# Altium PCB USER_SW_Breakout.pcbdoc (part 4 of 5)
Units mm, origin at the board's own origin, x right, y up, seen from the top; angles counter-clockwise.
Board outline 125 x 23.5 mm, 2 copper layers (Top Layer, Bottom Layer), stack 0.533 mm thick; 24 components, 16 nets, 4985 pads, 3 vias.
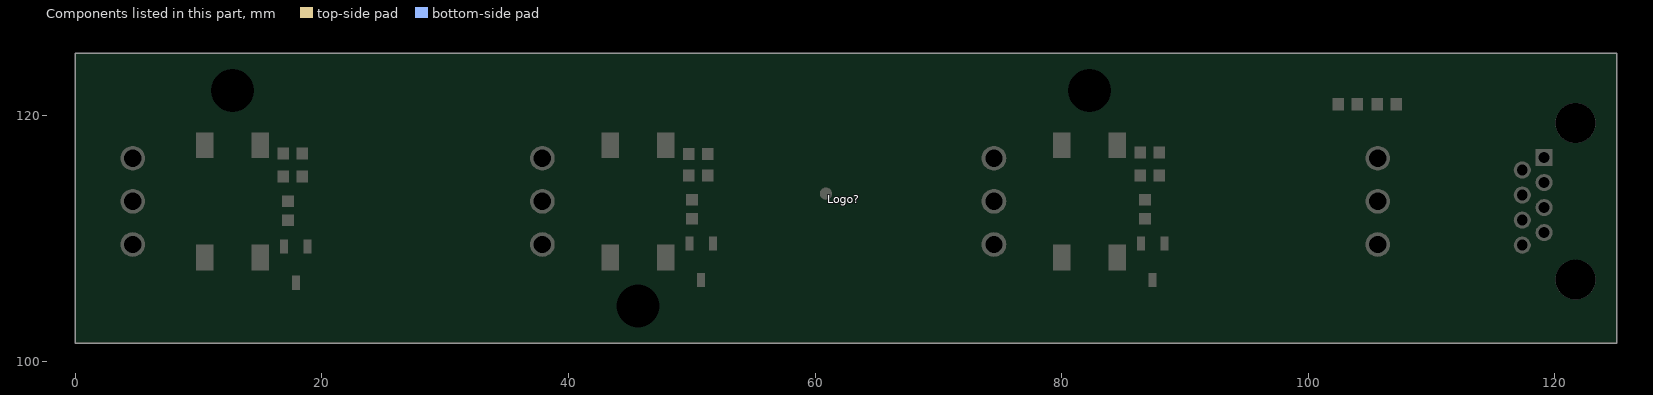
[diagram p4: the components of this part, seen from the top]

## Footprints (in the part's own frame and the unit in brackets; to place one, negate y for a bottom-side part, rotate by r counter-clockwise, add the part's x,y. Pads: shape width x height; smd on the part's side, far side on the other; paste and mask are expansions set on the pad) (continued)
Expatria-Logo [mil] "Expatria DXF logo" (continued)
  round 1.64 on Mech4: 1(-44849.01,43612.15) 1(-44849.01,43612.15) 1(-44848.55,43605.44) 1(-44848.55,43605.44) 1(-44848.1,43612.6) 1(-44848.1,43612.6) 1(-44847.68,43603.66) 1(-44847.68,43603.66) 1(-44846.77,43598.28) 1(-44846.77,43598.28) 1(-44845.44,43611.69) 1(-44845.44,43611.69) 1(-44844.53,43592.89) 1(-44844.53,43592.89) 1(-44844.08,43589.78) 1(-44844.08,43589.78) 1(-44842.3,43586.18) 1(-44842.3,43586.18) 1(-44841.84,43608.13) 1(-44841.84,43608.13) 1(-44841.84,43583.95) 1(-44841.84,43583.95) 1(-44841.39,43606.77) 1(-44841.39,43606.77) 1(-44840.52,43606.31) 1(-44840.52,43606.31) 1(-44840.06,43604.98) 1(-44840.06,43604.98) 1(-44838.73,43577.69) 1(-44838.73,43577.69) 1(-44838.73,43603.66) 1(-44838.73,43603.66) 1(-44838.28,43602.29) 1(-44838.28,43602.29) 1(-44837.37,43572.77) 1(-44837.37,43572.77) 1(-44836.92,43600.97) 1(-44836.92,43600.97) 1(-44836.04,43570.98) 1(-44836.04,43570.98) 1(-44835.59,43568.75) 1(-44835.59,43568.75) 1(-44835.13,43596.95) 1(-44835.13,43596.95) 1(-44834.26,43566.51) 1(-44834.26,43566.51) 1(-44834.26,43596.49) 1(-44834.26,43596.49) 1(-44833.81,43564.27) 1(-44833.81,43564.27) 1(-44833.81,43595.13) 1(-44833.81,43595.13) 1(-44832.9,43418.9) 1(-44832.9,43418.9) 1(-44832.9,43594.71) 1(-44832.9,43594.71) 1(-44832.44,43408.17) 1(-44832.44,43408.17) 1(-44832.44,43593.35) 1(-44832.44,43593.35) 1(-44831.57,43406.85) 1(-44831.57,43406.85) 1(-44831.57,43431.87) 1(-44831.57,43431.87) 1(-44831.12,43559.8) 1(-44831.12,43559.8) 1(-44831.12,43592.02) 1(-44831.12,43592.02) 1(-44830.66,43433.68) 1(-44830.66,43433.68) 1(-44830.66,43557.56) 1(-44830.66,43557.56) 1(-44830.66,43590.66) 1(-44830.66,43590.66) 1(-44830.21,43406.39) 1(-44830.21,43406.39) 1(-44830.21,43437.7) 1(-44830.21,43437.7) 1(-44829.79,43407.26) 1(-44829.79,43407.26) 1(-44829.33,43589.33) 1(-44829.33,43589.33) 1(-44828.88,43407.26) 1(-44828.88,43407.26) 1(-44828.88,43441.72) 1(-44828.88,43441.72) 1(-44827.97,43552.64) 1(-44827.97,43552.64) 1(-44827.55,43550.4) 1(-44827.55,43550.4) 1(-44827.55,43585.31) 1(-44827.55,43585.31) 1(-44826.64,43410.41) 1(-44826.64,43410.41) 1(-44826.64,43454.23) 1(-44826.64,43454.23) 1(-44826.19,43583.95) 1(-44826.19,43583.95) 1(-44825.73,43412.65) 1(-44825.73,43412.65) 1(-44825.73,43582.62) 1(-44825.73,43582.62) 1(-44825.31,43412.65) 1(-44825.31,43412.65) 1(-44824.41,43460.52) 1(-44824.41,43460.52) 1(-44824.41,43581.29) 1(-44824.41,43581.29) 1(-44823.95,43415.79) 1(-44823.95,43415.79) 1(-44823.95,43579.93) 1(-44823.95,43579.93) 1(-44823.5,43415.79) 1(-44823.5,43415.79) 1(-44823.08,43418.03) 1(-44823.08,43418.03) 1(-44823.08,43542.36) 1(-44823.08,43542.36) 1(-44822.62,43418.03) 1(-44822.62,43418.03) 1(-44822.62,43540.13) 1(-44822.62,43540.13) 1(-44822.62,43578.6) 1(-44822.62,43578.6) 1(-44822.17,43470.8) 1(-44822.17,43470.8) 1(-44822.17,43577.24) 1(-44822.17,43577.24) 1(-44821.71,43421.14) 1(-44821.71,43421.14) 1(-44821.26,43421.14) 1(-44821.26,43421.14) 1(-44820.84,43575.91) 1(-44820.84,43575.91) 1(-44820.39,43574.58) 1(-44820.39,43574.58) 1(-44819.93,43425.61) 1(-44819.93,43425.61) 1(-44819.48,43425.61) 1(-44819.48,43425.61) 1(-44819.02,43427.85) 1(-44819.02,43427.85) 1(-44818.6,43427.85) 1(-44818.6,43427.85) 1(-44817.7,43570.98) 1(-44817.7,43570.98) 1(-44817.24,43431.87) 1(-44817.24,43431.87) 1(-44817.24,43529.85) 1(-44817.24,43529.85) 1(-44817.24,43569.65) 1(-44817.24,43569.65) 1(-44816.79,43431.87) 1(-44816.79,43431.87) 1(-44816.37,43434.1) 1(-44816.37,43434.1) 1(-44816.37,43486.91) 1(-44816.37,43486.91) 1(-44815.91,43434.1) 1(-44815.91,43434.1) 1(-44815.91,43490.02) 1(-44815.91,43490.02) 1(-44815.46,43436.34) 1(-44815.46,43436.34) 1(-44815.01,43436.34) 1(-44815.01,43436.34) 1(-44815.01,43526.71) 1(-44815.01,43526.71) 1(-44815.01,43566.51) 1(-44815.01,43566.51) 1(-44814.55,43438.58) 1(-44814.55,43438.58) 1(-44814.55,43492.71) 1(-44814.55,43492.71) 1(-44814.13,43438.58) 1(-44814.13,43438.58) 1(-44814.13,43495.85) 1(-44814.13,43495.85) 1(-44814.13,43524.47) 1(-44814.13,43524.47) 1(-44814.13,43564.27) 1(-44814.13,43564.27) 1(-44813.22,43563.82) 1(-44813.22,43563.82) 1(-44813.22,43442.17) 1(-44813.22,43442.17) 1(-44812.77,43442.17) 1(-44812.77,43442.17) 1(-44812.77,43562.49) 1(-44812.77,43562.49) 1(-44812.31,43444.41) 1(-44812.31,43444.41) 1(-44811.9,43444.41) 1(-44811.9,43444.41) 1(-44811.44,43502.56) 1(-44811.44,43502.56) 1(-44811.44,43446.65) 1(-44811.44,43446.65) 1(-44811.44,43561.16) 1(-44811.44,43561.16) 1(-44810.99,43446.65) 1(-44810.99,43446.65) 1(-44810.99,43504.8) 1(-44810.99,43504.8) 1(-44810.99,43518.67) 1(-44810.99,43518.67) 1(-44810.99,43559.8) 1(-44810.99,43559.8) 1(-44810.53,43448.89) 1(-44810.53,43448.89) 1(-44810.08,43448.89) 1(-44810.08,43448.89) 1(-44809.66,43451.12) 1(-44809.66,43451.12) 1(-44809.2,43451.12) 1(-44809.2,43451.12) 1(-44809.2,43508.36) 1(-44809.2,43508.36) 1(-44809.2,43558.02) 1(-44809.2,43558.02) 1(-44808.75,43515.52) 1(-44808.75,43515.52) 1(-44808.75,43453.36) 1(-44808.75,43453.36) 1(-44808.75,43510.6) 1(-44808.75,43510.6) 1(-44808.75,43556.69) 1(-44808.75,43556.69) 1(-44808.3,43453.36) 1(-44808.3,43453.36) 1(-44807.84,43513.29) 1(-44807.84,43513.29) 1(-44807.42,43456.47) 1(-44807.42,43456.47) 1(-44807.42,43512.83) 1(-44807.42,43512.83) 1(-44807.42,43555.33) 1(-44807.42,43555.33) 1(-44806.97,43456.47) 1(-44806.97,43456.47) 1(-44806.97,43554) 1(-44806.97,43554) 1(-44806.51,43458.7) 1(-44806.51,43458.7) 1(-44806.06,43458.7) 1(-44806.06,43458.7) 1(-44805.6,43552.64) 1(-44805.6,43552.64) 1(-44805.19,43461.85) 1(-44805.19,43461.85) 1(-44804.73,43550.4) 1(-44804.73,43550.4) 1(-44804.73,43461.85) 1(-44804.73,43461.85) 1(-44803.82,43549.98) 1(-44803.82,43549.98) 1(-44803.37,43548.62) 1(-44803.37,43548.62) 1(-44802.95,43465.41) 1(-44802.95,43465.41) 1(-44801.59,43546.84) 1(-44801.59,43546.84) 1(-44801.13,43471.7) 1(-44801.13,43471.7) 1(-44801.13,43545.51) 1(-44801.13,43545.51) 1(-44800.71,43471.7) 1(-44800.71,43471.7) 1(-44800.26,43473.94) 1(-44800.26,43473.94) 1(-44800.26,43545.05) 1(-44800.26,43545.05) 1(-44799.8,43543.69) 1(-44799.8,43543.69) 1(-44799.8,43473.94) 1(-44799.8,43473.94) 1(-44798.9,43543.27) 1(-44798.9,43543.27) 1(-44798.48,43541.91) 1(-44798.48,43541.91) 1(-44797.57,43541.45) 1(-44797.57,43541.45) 1(-44797.11,43540.13) 1(-44797.11,43540.13) 1(-44795.79,43539.22) 1(-44795.79,43539.22) 1(-44794.88,43483.76) 1(-44794.88,43483.76) 1(-44794.42,43486) 1(-44794.42,43486) 1(-44794,43486) 1(-44794,43486) 1(-44793.1,43488.69) 1(-44793.1,43488.69) 1(-44791.77,43546.84) 1(-44791.77,43546.84) 1(-44790.4,43486) 1(-44790.4,43486) 1(-44789.95,43484.67) 1(-44789.95,43484.67) 1(-44788.17,43481.52) 1(-44788.17,43481.52) 1(-44786.84,43480.2) 1(-44786.84,43480.2) 1(-44786.39,43478.83) 1(-44786.39,43478.83) 1(-44785.48,43558.93) 1(-44785.48,43558.93) 1(-44785.06,43560.26) 1(-44785.06,43560.26) 1(-44784.6,43477.5) 1(-44784.6,43477.5) 1(-44784.15,43476.18) 1(-44784.15,43476.18) 1(-44783.24,43475.72) 1(-44783.24,43475.72) 1(-44782.82,43474.36) 1(-44782.82,43474.36) 1(-44782.82,43563.4) 1(-44782.82,43563.4) 1(-44782.37,43564.73) 1(-44782.37,43564.73) 1(-44781,43566.06) 1(-44781,43566.06) 1(-44780.58,43567.42) 1(-44780.58,43567.42) 1(-44780.13,43471.7) 1(-44780.13,43471.7) 1(-44779.68,43470.34) 1(-44779.68,43470.34) 1(-44779.22,43568.75) 1(-44779.22,43568.75) 1(-44778.77,43570.11) 1(-44778.77,43570.11) 1(-44778.35,43516.85) 1(-44778.35,43516.85) 1(-44777.89,43467.23) 1(-44777.89,43467.23) 1(-44777.89,43516.85) 1(-44777.89,43516.85) 1(-44777.89,43570.53) 1(-44777.89,43570.53) 1(-44777.44,43571.89) 1(-44777.44,43571.89) 1(-44776.99,43519.09) 1(-44776.99,43519.09) 1(-44776.53,43519.09) 1(-44776.53,43519.09) 1(-44776.11,43514.62) 1(-44776.11,43514.62) 1(-44776.11,43465.87) 1(-44776.11,43465.87) 1(-44775.66,43513.29) 1(-44775.66,43513.29) 1(-44775.66,43464.54) 1(-44775.66,43464.54) 1(-44775.2,43522.23) 1(-44775.2,43522.23) 1(-44775.2,43575) 1(-44775.2,43575) 1(-44774.75,43522.23) 1(-44774.75,43522.23) 1(-44774.75,43576.37) 1(-44774.75,43576.37) 1(-44773.88,43524.47) 1(-44773.88,43524.47) 1(-44773.88,43511.96) 1(-44773.88,43511.96) 1(-44773.42,43510.6) 1(-44773.42,43510.6) 1(-44773.42,43577.69) 1(-44773.42,43577.69) 1(-44773.42,43524.47) 1(-44773.42,43524.47) 1(-44772.97,43579.06) 1(-44772.97,43579.06) 1(-44772.51,43526.71) 1(-44772.51,43526.71) 1(-44772.06,43526.71) 1(-44772.06,43526.71) 1(-44771.64,43509.27) 1(-44771.64,43509.27) 1(-44771.64,43580.38) 1(-44771.64,43580.38) 1(-44771.18,43460.52) 1(-44771.18,43460.52) 1(-44771.18,43507.91) 1(-44771.18,43507.91) 1(-44771.18,43528.94) 1(-44771.18,43528.94) 1(-44771.18,43581.71) 1(-44771.18,43581.71) 1(-44770.73,43459.16) 1(-44770.73,43459.16) 1(-44770.73,43528.94) 1(-44770.73,43528.94) 1(-44770.28,43582.17) 1(-44770.28,43582.17) 1(-44769.82,43531.18) 1(-44769.82,43531.18) 1(-44769.82,43583.53) 1(-44769.82,43583.53) 1(-44769.4,43531.18) 1(-44769.4,43531.18) 1(-44768.95,43457.83) 1(-44768.95,43457.83) 1(-44768.95,43506.13) 1(-44768.95,43506.13) 1(-44768.95,43532.51) 1(-44768.95,43532.51) 1(-44768.95,43583.95) 1(-44768.95,43583.95) 1(-44768.49,43456.47) 1(-44768.49,43456.47) 1(-44768.49,43504.8) 1(-44768.49,43504.8) 1(-44768.49,43532.51) 1(-44768.49,43532.51) 1(-44768.49,43585.31) 1(-44768.49,43585.31) 1(-44768.04,43533.87) 1(-44768.04,43533.87) 1(-44767.59,43533.87) 1(-44767.59,43533.87) 1(-44767.59,43585.76) 1(-44767.59,43585.76) 1(-44767.17,43535.2) 1(-44767.17,43535.2) 1(-44767.17,43587.09) 1(-44767.17,43587.09) 1(-44766.71,43455.14) 1(-44766.71,43455.14) 1(-44766.71,43535.2) 1(-44766.71,43535.2) 1(-44766.26,43453.81) 1(-44766.26,43453.81) 1(-44766.26,43536.56) 1(-44766.26,43536.56) 1(-44765.8,43536.56) 1(-44765.8,43536.56) 1(-44765.8,43588) 1(-44765.8,43588) 1(-44765.35,43537.89) 1(-44765.35,43537.89) 1(-44765.35,43589.33) 1(-44765.35,43589.33) 1(-44764.93,43537.89) 1(-44764.93,43537.89) 1(-44764.02,43451.99) 1(-44764.02,43451.99) 1(-44763.57,43450.67) 1(-44763.57,43450.67) 1(-44763.57,43590.66) 1(-44763.57,43590.66) 1(-44763.11,43541.04) 1(-44763.11,43541.04) 1(-44763.11,43592.02) 1(-44763.11,43592.02) 1(-44762.69,43541.04) 1(-44762.69,43541.04) 1(-44761.78,43542.82) 1(-44761.78,43542.82) 1(-44761.33,43542.82) 1(-44761.33,43542.82) 1(-44761.33,43593.35) 1(-44761.33,43593.35) 1(-44760.88,43544.15) 1(-44760.88,43544.15) 1(-44760.88,43594.71) 1(-44760.88,43594.71) 1(-44760.46,43544.15) 1(-44760.46,43544.15) 1(-44759.55,43545.93) 1(-44759.55,43545.93) 1(-44759.09,43596.04) 1(-44759.09,43596.04) 1(-44759.09,43545.93) 1(-44759.09,43545.93) 1(-44758.64,43547.29) 1(-44758.64,43547.29) 1(-44758.64,43597.37) 1(-44758.64,43597.37) 1(-44758.22,43547.29) 1(-44758.22,43547.29) 1(-44757.31,43549.07) 1(-44757.31,43549.07) 1(-44756.86,43549.07) 1(-44756.86,43549.07) 1(-44756.86,43598.73) 1(-44756.86,43598.73) 1(-44756.4,43493.16) 1(-44756.4,43493.16) 1(-44756.4,43550.4) 1(-44756.4,43550.4) 1(-44756.4,43600.06) 1(-44756.4,43600.06) 1(-44755.98,43491.83) 1(-44755.98,43491.83) 1(-44755.98,43550.4) 1(-44755.98,43550.4) 1(-44755.07,43552.22) 1(-44755.07,43552.22) 1(-44754.62,43552.22) 1(-44754.62,43552.22) 1(-44754.17,43553.55) 1(-44754.17,43553.55) 1(-44753.75,43489.6) 1(-44753.75,43489.6) 1(-44753.75,43553.55) 1(-44753.75,43553.55) 1(-44752.84,43555.33) 1(-44752.84,43555.33) 1(-44752.38,43489.14) 1(-44752.38,43489.14) 1(-44752.38,43555.33) 1(-44752.38,43555.33) 1(-44751.06,43487.36) 1(-44751.06,43487.36) 1(-44751.06,43556.69) 1(-44751.06,43556.69) 1(-44750.6,43558.02) 1(-44750.6,43558.02) 1(-44750.15,43558.02) 1(-44750.15,43558.02) 1(-44749.69,43486.91) 1(-44749.69,43486.91) 1(-44748.36,43435.47) 1(-44748.36,43435.47) 1(-44748.36,43559.8) 1(-44748.36,43559.8) 1(-44747.91,43561.16) 1(-44747.91,43561.16) 1(-44747.46,43561.16) 1(-44747.46,43561.16) 1(-44747.04,43435.01) 1(-44747.04,43435.01) 1(-44745.22,43481.98) 1(-44745.22,43481.98) 1(-44743.89,43481.52) 1(-44743.89,43481.52) 1(-44742.98,43430.54) 1(-44742.98,43430.54) 1(-44742.98,43565.64) 1(-44742.98,43565.64) 1(-44742.56,43479.74) 1(-44742.56,43479.74) 1(-44742.56,43566.97) 1(-44742.56,43566.97) 1(-44742.11,43566.97) 1(-44742.11,43566.97) 1(-44741.66,43430.08) 1(-44741.66,43430.08) 1(-44741.2,43479.29) 1(-44741.2,43479.29) 1(-44739.87,43616.62) 1(-44739.87,43616.62) 1(-44739.87,43428.3) 1(-44739.87,43428.3) 1(-44739.42,43477.05) 1(-44739.42,43477.05) 1(-44738.51,43427.85) 1(-44738.51,43427.85) 1(-44738.51,43617.08) 1(-44738.51,43617.08) 1(-44738.09,43476.59) 1(-44738.09,43476.59) 1(-44737.18,43426.07) 1(-44737.18,43426.07) 1(-44737.18,43618.86) 1(-44737.18,43618.86) 1(-44735.86,43425.61) 1(-44735.86,43425.61) 1(-44735.86,43619.31) 1(-44735.86,43619.31) 1(-44735.4,43473.94) 1(-44735.4,43473.94) 1(-44734.04,43423.37) 1(-44734.04,43423.37) 1(-44734.04,43473.49) 1(-44734.04,43473.49) 1(-44734.04,43621.55) 1(-44734.04,43621.55) 1(-44733.62,43472.58) 1(-44733.62,43472.58) 1(-44732.71,43422.92) 1(-44732.71,43422.92) 1(-44732.71,43621.97) 1(-44732.71,43621.97) 1(-44732.25,43472.12) 1(-44732.25,43472.12) 1(-44731.38,43421.14) 1(-44731.38,43421.14) 1(-44731.38,43623.79) 1(-44731.38,43623.79) 1(-44730.47,43579.06) 1(-44730.47,43579.06) 1(-44730.02,43420.68) 1(-44730.02,43420.68) 1(-44730.02,43624.21) 1(-44730.02,43624.21) 1(-44729.57,43469.47) 1(-44729.57,43469.47) 1(-44729.57,43579.06) 1(-44729.57,43579.06) 1(-44729.15,43625.57) 1(-44729.15,43625.57) 1(-44728.24,43418.9) 1(-44728.24,43418.9) 1(-44728.24,43469.01) 1(-44728.24,43469.01) 1(-44727.78,43581.29) 1(-44727.78,43581.29) 1(-44727.78,43626.02) 1(-44727.78,43626.02) 1(-44727.33,43626.89) 1(-44727.33,43626.89) 1(-44726.91,43418.45) 1(-44726.91,43418.45) 1(-44726.91,43581.29) 1(-44726.91,43581.29) 1(-44726.45,43467.23) 1(-44726.45,43467.23) 1(-44726,43627.35) 1(-44726,43627.35) 1(-44725.55,43628.26) 1(-44725.55,43628.26) 1(-44725.09,43416.67) 1(-44725.09,43416.67) 1(-44725.09,43466.78) 1(-44725.09,43466.78) 1(-44724.67,43583.95) 1(-44724.67,43583.95) 1(-44724.22,43628.68) 1(-44724.22,43628.68) 1(-44723.76,43416.21) 1(-44723.76,43416.21) 1(-44723.76,43583.95) 1(-44723.76,43583.95) 1(-44723.31,43464.99) 1(-44723.31,43464.99) 1(-44722.85,43630.04) 1(-44722.85,43630.04) 1(-44721.98,43414.43) 1(-44721.98,43414.43) 1(-44721.98,43464.54) 1(-44721.98,43464.54) 1(-44721.98,43586.18) 1(-44721.98,43586.18) 1(-44721.53,43630.5) 1(-44721.53,43630.5) 1(-44721.07,43586.18) 1(-44721.07,43586.18) 1(-44720.2,43462.76) 1(-44720.2,43462.76) 1(-44720.2,43587.55) 1(-44720.2,43587.55) 1(-44720.2,43631.82) 1(-44720.2,43631.82) 1(-44719.29,43587.55) 1(-44719.29,43587.55) 1(-44718.84,43462.3) 1(-44718.84,43462.3) 1(-44718.84,43588.42) 1(-44718.84,43588.42) 1(-44718.38,43461.39) 1(-44718.38,43461.39) 1(-44717.96,43588.42) 1(-44717.96,43588.42) 1(-44717.96,43632.73) 1(-44717.96,43632.73) 1(-44717.05,43412.19) 1(-44717.05,43412.19) 1(-44717.05,43589.78) 1(-44717.05,43589.78) 1(-44716.6,43634.06) 1(-44716.6,43634.06) 1(-44716.15,43589.78) 1(-44716.15,43589.78) 1(-44715.73,43590.66) 1(-44715.73,43590.66) 1(-44715.27,43634.51) 1(-44715.27,43634.51) 1(-44715.27,43410.41) 1(-44715.27,43410.41) 1(-44715.27,43460.07) 1(-44715.27,43460.07) 1(-44714.82,43590.66) 1(-44714.82,43590.66) 1(-44713.91,43458.7) 1(-44713.91,43458.7) 1(-44713.91,43592.02) 1(-44713.91,43592.02) 1(-44713.91,43635.84) 1(-44713.91,43635.84) 1(-44713.04,43592.02) 1(-44713.04,43592.02) 1(-44712.58,43458.28) 1(-44712.58,43458.28) 1(-44712.58,43592.89) 1(-44712.58,43592.89) 1(-44712.58,43636.3) 1(-44712.58,43636.3) 1(-44712.13,43409.08) 1(-44712.13,43409.08) 1(-44712.13,43457.38) 1(-44712.13,43457.38) 1(-44711.67,43592.89) 1(-44711.67,43592.89) 1(-44710.8,43594.26) 1(-44710.8,43594.26) 1(-44709.89,43594.26) 1(-44709.89,43594.26) 1(-44709.44,43595.13) 1(-44709.44,43595.13) 1(-44709.44,43638.53) 1(-44709.44,43638.53) 1(-44709.02,43455.59) 1(-44709.02,43455.59) 1(-44708.56,43406.85) 1(-44708.56,43406.85) 1(-44708.56,43595.13) 1(-44708.56,43595.13) 1(-44708.11,43596.04) 1(-44708.11,43596.04) 1(-44708.11,43638.99) 1(-44708.11,43638.99) 1(-44707.2,43596.04) 1(-44707.2,43596.04) 1(-44706.78,43454.69) 1(-44706.78,43454.69) 1(-44706.78,43596.95) 1(-44706.78,43596.95) 1(-44705.87,43596.95) 1(-44705.87,43596.95) 1(-44705.42,43405.03) 1(-44705.42,43405.03) 1(-44705.42,43453.36) 1(-44705.42,43453.36) 1(-44705.42,43597.82) 1(-44705.42,43597.82) 1(-44704.96,43641.22) 1(-44704.96,43641.22) 1(-44704.55,43597.82) 1(-44704.55,43597.82) 1(-44704.09,43598.73) 1(-44704.09,43598.73) 1(-44703.18,43598.73) 1(-44703.18,43598.73) 1(-44702.31,43451.58) 1(-44702.31,43451.58) 1(-44701.85,43600.06) 1(-44701.85,43600.06) 1(-44700.94,43600.06) 1(-44700.94,43600.06) 1(-44699.16,43449.76) 1(-44699.16,43449.76) 1(-44696.93,43449.34) 1(-44696.93,43449.34) 1(-44696.47,43645.7) 1(-44696.47,43645.7) 1(-44694.23,43646.15) 1(-44694.23,43646.15) 1(-44693.36,43647.02) 1(-44693.36,43647.02) 1(-44691.12,43397.45) 1(-44691.12,43397.45) 1(-44691.12,43647.48) 1(-44691.12,43647.48) 1(-44689.31,43648.81) 1(-44689.31,43648.81) 1(-44688.89,43444.87) 1(-44688.89,43444.87) 1(-44687.07,43649.26) 1(-44687.07,43649.26) 1(-44686.65,43444.41) 1(-44686.65,43444.41) 1(-44686.2,43396.08) 1(-44686.2,43396.08) 1(-44685.74,43443.5) 1(-44685.74,43443.5) 1(-44685.74,43608.13) 1(-44685.74,43608.13) 1(-44684.42,43608.13) 1(-44684.42,43608.13) 1(-44683.96,43651.04) 1(-44683.96,43651.04) 1(-44683.51,43394.3) 1(-44683.51,43394.3) 1(-44682.6,43609.46) 1(-44682.6,43609.46) 1(-44682.18,43442.63) 1(-44682.18,43442.63) 1(-44681.27,43609.46) 1(-44681.27,43609.46) 1(-44680.36,43610.37) 1(-44680.36,43610.37) 1(-44679.03,43610.37) 1(-44679.03,43610.37) 1(-44678.58,43440.81) 1(-44678.58,43440.81) 1(-44676.8,43611.69) 1(-44676.8,43611.69) 1(-44676.34,43653.73) 1(-44676.34,43653.73) 1(-44675.89,43392.06) 1(-44675.89,43392.06) 1(-44675.47,43611.69) 1(-44675.47,43611.69) 1(-44671.87,43613.48) 1(-44671.87,43613.48) 1(-44671,43438.58) 1(-44671,43438.58) 1(-44670.54,43613.48) 1(-44670.54,43613.48) 1(-44668.76,43656.42) 1(-44668.76,43656.42) 1(-44667.85,43388.95) 1(-44667.85,43388.95) 1(-44667.85,43614.84) 1(-44667.85,43614.84) 1(-44667.4,43436.79) 1(-44667.4,43436.79) 1(-44666.07,43614.84) 1(-44666.07,43614.84) 1(-44665.16,43615.71) 1(-44665.16,43615.71) 1(-44663.83,43615.71) 1(-44663.83,43615.71) 1(-44663.83,43388.5) 1(-44663.83,43388.5) 1(-44662.92,43435.92) 1(-44662.92,43435.92) 1(-44660.69,43616.62) 1(-44660.69,43616.62) 1(-44660.23,43434.56) 1(-44660.23,43434.56) 1(-44659.81,43386.72) 1(-44659.81,43386.72) 1(-44656.67,43617.95) 1(-44656.67,43617.95) 1(-44656.21,43659.57) 1(-44656.21,43659.57) 1(-44654.43,43617.95) 1(-44654.43,43617.95) 1(-44653.1,43432.78) 1(-44653.1,43432.78) 1(-44653.1,43618.86) 1(-44653.1,43618.86) 1(-44652.2,43659.99) 1(-44652.2,43659.99) 1(-44651.29,43385.35) 1(-44651.29,43385.35) 1(-44650.87,43618.86) 1(-44650.87,43618.86) 1(-44649.05,43432.32) 1(-44649.05,43432.32) 1(-44649.05,43619.73) 1(-44649.05,43619.73) 1(-44646.4,43619.73) 1(-44646.4,43619.73) 1(-44645.03,43430.99) 1(-44645.03,43430.99) 1(-44644.58,43620.64) 1(-44644.58,43620.64) 1(-44643.7,43662.22) 1(-44643.7,43662.22) 1(-44642.8,43383.12) 1(-44642.8,43383.12) 1(-44642.34,43620.64) 1(-44642.34,43620.64) 1(-44640.56,43621.55) 1(-44640.56,43621.55) 1(-44639.23,43430.54) 1(-44639.23,43430.54) 1(-44638.32,43621.55) 1(-44638.32,43621.55) 1(-44636.99,43429.63) 1(-44636.99,43429.63) 1(-44636.54,43622.42) 1(-44636.54,43622.42) 1(-44634.31,43622.42) 1(-44634.31,43622.42) 1(-44631.61,43381.79) 1(-44631.61,43381.79) 1(-44631.16,43429.21) 1(-44631.16,43429.21) 1(-44630.29,43623.33) 1(-44630.29,43623.33) 1(-44629.38,43380.88) 1(-44629.38,43380.88) 1(-44628.92,43428.3) 1(-44628.92,43428.3) 1(-44625.81,43623.33) 1(-44625.81,43623.33) 1(-44623.12,43427.39) 1(-44623.12,43427.39) 1(-44621.79,43624.21) 1(-44621.79,43624.21) 1(-44621.34,43665.37) 1(-44621.34,43665.37) 1(-44620.43,43378.64) 1(-44620.43,43378.64) 1(-44617.32,43624.21) 1(-44617.32,43624.21) 1(-44615.5,43379.55) 1(-44615.5,43379.55) 1(-44610.61,43426.52) 1(-44610.61,43426.52) 1(-44608.38,43625.57) 1(-44608.38,43625.57) 1(-44606.14,43379.1) 1(-44606.14,43379.1) 1(-44599.43,43625.57) 1(-44599.43,43625.57) 1(-44597.19,43666.7) 1(-44597.19,43666.7) 1(-44589.12,43426.07) 1(-44589.12,43426.07) 1(-44577.06,43379.55) 1(-44577.06,43379.55) 1(-44575.25,43426.97) 1(-44575.25,43426.97) 1(-44572.14,43379.55) 1(-44572.14,43379.55) 1(-44566.75,43378.64) 1(-44566.75,43378.64) 1(-44566.3,43428.3) 1(-44566.3,43428.3) 1(-44564.06,43626.02) 1(-44564.06,43626.02) 1(-44557.81,43428.76) 1(-44557.81,43428.76) 1(-44556.93,43381.34) 1(-44556.93,43381.34) 1(-44556.03,43666.28) 1(-44556.03,43666.28) 1(-44554.24,43429.63) 1(-44554.24,43429.63) 1(-44551.55,43381.34) 1(-44551.55,43381.34) 1(-44548.41,43430.08) 1(-44548.41,43430.08) 1(-44543.52,43431.45) 1(-44543.52,43431.45) 1(-44539.46,43624.21) 1(-44539.46,43624.21) 1(-44539.04,43383.12) 1(-44539.04,43383.12) 1(-44536.35,43432.32) 1(-44536.35,43432.32) 1(-44534.99,43623.33) 1(-44534.99,43623.33) 1(-44530.97,43384.9) 1(-44530.97,43384.9) 1(-44526.04,43435.01) 1(-44526.04,43435.01) 1(-44525.62,43622.88) 1(-44525.62,43622.88) 1(-44525.62,43384.9) 1(-44525.62,43384.9) 1(-44523.81,43663.59) 1(-44523.81,43663.59) 1(-44522.93,43435.47) 1(-44522.93,43435.47) 1(-44521.57,43436.34) 1(-44521.57,43436.34) 1(-44520.24,43386.72) 1(-44520.24,43386.72) 1(-44517.55,43386.72) 1(-44517.55,43386.72) 1(-44513.99,43437.7) 1(-44513.99,43437.7) 1(-44512.62,43438.58) 1(-44512.62,43438.58) 1(-44509.51,43388.95) 1(-44509.51,43388.95) 1(-44508.15,43439.48) 1(-44508.15,43439.48) 1(-44506.82,43388.95) 1(-44506.82,43388.95) 1(-44505.92,43440.81) 1(-44505.92,43440.81) 1(-44501.02,43441.72) 1(-44501.02,43441.72) 1(-44498.33,43660.44) 1(-44498.33,43660.44) 1(-44492.5,43659.11) 1(-44492.5,43659.11) 1(-44491.62,43445.28) 1(-44491.62,43445.28) 1(-44490.26,43617.95) 1(-44490.26,43617.95) 1(-44488.02,43617.08) 1(-44488.02,43617.08) 1(-44486.69,43658.66) 1(-44486.69,43658.66) 1(-44484,43447.52) 1(-44484,43447.52) 1(-44483.13,43616.62) 1(-44483.13,43616.62) 1(-44481.77,43448.89) 1(-44481.77,43448.89) 1(-44481.31,43395.21) 1(-44481.31,43395.21) 1(-44475.51,43656.42) 1(-44475.51,43656.42) 1(-44475.51,43450.67) 1(-44475.51,43450.67) 1(-44473.28,43398.32) 1(-44473.28,43398.32) 1(-44472.37,43452.45) 1(-44472.37,43452.45) 1(-44471.95,43614.39) 1(-44471.95,43614.39) 1(-44471.49,43398.32) 1(-44471.49,43398.32) 1(-44469.71,43655.97) 1(-44469.71,43655.97) 1(-44464.79,43613.93) 1(-44464.79,43613.93) 1(-44464.33,43654.64) 1(-44464.33,43654.64) 1(-44462.09,43455.59) 1(-44462.09,43455.59) 1(-44460.77,43612.6) 1(-44460.77,43612.6) 1(-44459.4,43654.19) 1(-44459.4,43654.19) 1(-44458.95,43457.38) 1(-44458.95,43457.38) 1(-44457.17,43653.28) 1(-44457.17,43653.28) 1(-44456.71,43403.25) 1(-44456.71,43403.25) 1(-44456.71,43457.83) 1(-44456.71,43457.83) 1(-44454.93,43403.25) 1(-44454.93,43403.25) 1(-44454.93,43612.15) 1(-44454.93,43612.15) 1(-44454.48,43459.16) 1(-44454.48,43459.16) 1(-44453.15,43404.61) 1(-44453.15,43404.61) 1(-44451.82,43404.61) 1(-44451.82,43404.61) 1(-44450.91,43405.48) 1(-44450.91,43405.48) 1(-44449.58,43405.48) 1(-44449.58,43405.48) 1(-44449.58,43610.79) 1(-44449.58,43610.79) 1(-44446.89,43461.39) 1(-44446.89,43461.39) 1(-44445.53,43407.26) 1(-44445.53,43407.26) 1(-44444.66,43462.76) 1(-44444.66,43462.76) 1(-44443.75,43407.26) 1(-44443.75,43407.26) 1(-44443.75,43610.37) 1(-44443.75,43610.37) 1(-44442.42,43463.18) 1(-44442.42,43463.18) 1(-44441.97,43408.63) 1(-44441.97,43408.63) 1(-44441.51,43464.09) 1(-44441.51,43464.09) 1(-44441.06,43650.62) 1(-44441.06,43650.62) 1(-44440.64,43408.63) 1(-44440.64,43408.63) 1(-44439.73,43409.5) 1(-44439.73,43409.5) 1(-44439.27,43464.54) 1(-44439.27,43464.54) 1(-44438.4,43409.5) 1(-44438.4,43409.5) 1(-44437.04,43649.26) 1(-44437.04,43649.26) 1(-44434.35,43411.32) 1(-44434.35,43411.32) 1(-44433.93,43608.55) 1(-44433.93,43608.55) 1(-44433.47,43467.65) 1(-44433.47,43467.65) 1(-44433.02,43648.81) 1(-44433.02,43648.81) 1(-44432.56,43411.32) 1(-44432.56,43411.32) 1(-44432.11,43607.68) 1(-44432.11,43607.68) 1(-44430.78,43412.65) 1(-44430.78,43412.65) 1(-44429.87,43468.56) 1(-44429.87,43468.56) 1(-44429.45,43412.65) 1(-44429.45,43412.65) 1(-44429,43647.48) 1(-44429,43647.48) 1(-44428.55,43413.56) 1(-44428.55,43413.56) 1(-44427.22,43413.56) 1(-44427.22,43413.56) 1(-44426.31,43414.43) 1(-44426.31,43414.43) 1(-44426.31,43470.8) 1(-44426.31,43470.8) 1(-44426.31,43607.22) 1(-44426.31,43607.22) 1(-44424.98,43414.43) 1(-44424.98,43414.43) 1(-44424.98,43647.02) 1(-44424.98,43647.02) 1(-44424.07,43415.34) 1(-44424.07,43415.34) 1(-44424.07,43471.25) 1(-44424.07,43471.25) 1(-44422.75,43415.34) 1(-44422.75,43415.34) 1(-44420.93,43645.7) 1(-44420.93,43645.7) 1(-44420.06,43605.44) 1(-44420.06,43605.44) 1(-44419.6,43417.12) 1(-44419.6,43417.12) 1(-44419.6,43473.94) 1(-44419.6,43473.94) 1(-44418.27,43417.12) 1(-44418.27,43417.12) 1(-44417.36,43418.03) 1(-44417.36,43418.03) 1(-44417.36,43474.36) 1(-44417.36,43474.36) 1(-44416.91,43645.24) 1(-44416.91,43645.24) 1(-44416.04,43418.03) 1(-44416.04,43418.03) 1(-44415.13,43475.72) 1(-44415.13,43475.72) 1(-44414.22,43604.98) 1(-44414.22,43604.98) 1(-44412.89,43476.18) 1(-44412.89,43476.18) 1(-44412.89,43643.91) 1(-44412.89,43643.91) 1(-44411.56,43420.68) 1(-44411.56,43420.68) 1(-44410.2,43420.68) 1(-44410.2,43420.68) 1(-44409.33,43421.59) 1(-44409.33,43421.59) 1(-44409.33,43478.41) 1(-44409.33,43478.41) 1(-44408.87,43643.46) 1(-44408.87,43643.46) 1(-44407.96,43421.59) 1(-44407.96,43421.59) 1(-44407.96,43603.2) 1(-44407.96,43603.2) 1(-44407.09,43422.5) 1(-44407.09,43422.5) 1(-44407.09,43478.83) 1(-44407.09,43478.83) 1(-44405.73,43422.5) 1(-44405.73,43422.5) 1(-44402.62,43641.68) 1(-44402.62,43641.68) 1(-44401.71,43602.29) 1(-44401.71,43602.29) 1(-44396.78,43484.21) 1(-44396.78,43484.21) 1(-44396.33,43640.77) 1(-44396.33,43640.77) 1(-44395.91,43600.51) 1(-44395.91,43600.51) 1(-44394.55,43428.3) 1(-44394.55,43428.3) 1(-44393.22,43428.3) 1(-44393.22,43428.3) 1(-44390.07,43487.78) 1(-44390.07,43487.78) 1(-44387.84,43488.23) 1(-44387.84,43488.23) 1(-44387.38,43599.6) 1(-44387.38,43599.6) 1(-44383.82,43637.21) 1(-44383.82,43637.21) 1(-44383.36,43433.68) 1(-44383.36,43433.68) 1(-44382.03,43433.68) 1(-44382.03,43433.68) 1(-44380.25,43597.82) 1(-44380.25,43597.82) 1(-44377.56,43436.34) 1(-44377.56,43436.34) 1(-44377.11,43596.49) 1(-44377.11,43596.49) 1(-44376.2,43436.34) 1(-44376.2,43436.34) 1(-44375.78,43437.25) 1(-44375.78,43437.25) 1(-44374.87,43437.25) 1(-44374.87,43437.25) 1(-44374.42,43495.4) 1(-44374.42,43495.4) 1(-44373.54,43438.58) 1(-44373.54,43438.58) 1(-44372.64,43438.58) 1(-44372.64,43438.58) 1(-44369.49,43440.81) 1(-44369.49,43440.81) 1(-44368.62,43440.81) 1(-44368.62,43440.81) 1(-44364.6,43594.26) 1(-44364.6,43594.26) 1(-44360.54,43445.28) 1(-44360.54,43445.28) 1(-44359.21,43445.28) 1(-44359.21,43445.28) 1(-44358.76,43446.19) 1(-44358.76,43446.19) 1(-44357.89,43446.19) 1(-44357.89,43446.19) 1(-44356.53,43447.52) 1(-44356.53,43447.52) 1(-44356.07,43504.34) 1(-44356.07,43504.34) 1(-44355.65,43447.52) 1(-44355.65,43447.52) 1(-44354.74,43505.67) 1(-44354.74,43505.67) 1(-44354.74,43592.02) 1(-44354.74,43592.02) 1(-44353.41,43506.13) 1(-44353.41,43506.13) 1(-44352.51,43449.76) 1(-44352.51,43449.76) 1(-44351.6,43449.76) 1(-44351.6,43449.76) 1(-44351.6,43590.66) 1(-44351.6,43590.66) 1(-44350.27,43508.36) 1(-44350.27,43508.36) 1(-44347.58,43451.99) 1(-44347.58,43451.99) 1(-44347.12,43510.14) 1(-44347.12,43510.14) 1(-44346.25,43453.36) 1(-44346.25,43453.36) 1(-44345.34,43453.36) 1(-44345.34,43453.36) 1(-44344.01,43454.69) 1(-44344.01,43454.69) 1(-44343.1,43454.69) 1(-44343.1,43454.69) 1(-44343.1,43626.89) 1(-44343.1,43626.89) 1(-44341.78,43456.05) 1(-44341.78,43456.05) 1(-44340.87,43456.05) 1(-44340.87,43456.05) 1(-44340,43626.44) 1(-44340,43626.44) 1(-44339.54,43457.38) 1(-44339.54,43457.38) 1(-44338.63,43457.38) 1(-44338.63,43457.38) 1(-44338.63,43588.42) 1(-44338.63,43588.42) 1(-44337.76,43515.07) 1(-44337.76,43515.07) 1(-44336.85,43625.11) 1(-44336.85,43625.11) 1(-44335.07,43459.61) 1(-44335.07,43459.61) 1(-44334.61,43516.85) 1(-44334.61,43516.85) 1(-44333.71,43624.66) 1(-44333.71,43624.66) 1(-44331.92,43461.85) 1(-44331.92,43461.85) 1(-44331.92,43586.18) 1(-44331.92,43586.18) 1(-44331.47,43518.67) 1(-44331.47,43518.67) 1(-44331.05,43461.85) 1(-44331.05,43461.85) 1(-44330.6,43462.76) 1(-44330.6,43462.76) 1(-44330.6,43623.33) 1(-44330.6,43623.33) 1(-44329.69,43462.76) 1(-44329.69,43462.76) 1(-44328.36,43464.09) 1(-44328.36,43464.09) 1(-44328.36,43520.45) 1(-44328.36,43520.45) 1(-44327.45,43464.09) 1(-44327.45,43464.09) 1(-44327.45,43622.88) 1(-44327.45,43622.88) 1(-44325.21,43522.23) 1(-44325.21,43522.23) 1(-44325.21,43584.86) 1(-44325.21,43584.86) 1(-44324.34,43621.55) 1(-44324.34,43621.55) 1(-44323.89,43466.32) 1(-44323.89,43466.32) 1(-44322.1,43524.02) 1(-44322.1,43524.02) 1(-44321.19,43621.1) 1(-44321.19,43621.1) 1(-44320.74,43468.56) 1(-44320.74,43468.56) 1(-44319.87,43468.56) 1(-44319.87,43468.56) 1(-44319.41,43469.47) 1(-44319.41,43469.47) 1(-44318.96,43525.8) 1(-44318.96,43525.8) 1(-44318.5,43469.47) 1(-44318.5,43469.47) 1(-44318.05,43470.34) 1(-44318.05,43470.34) 1(-44318.05,43619.73) 1(-44318.05,43619.73) 1(-44317.18,43470.34) 1(-44317.18,43470.34) 1(-44316.72,43471.25) 1(-44316.72,43471.25) 1(-44316.72,43526.71) 1(-44316.72,43526.71) 1(-44315.81,43471.25) 1(-44315.81,43471.25) 1(-44315.81,43582.62) 1(-44315.81,43582.62) 1(-44315.4,43472.12) 1(-44315.4,43472.12) 1(-44314.94,43619.31) 1(-44314.94,43619.31) 1(-44314.49,43472.12) 1(-44314.49,43472.12) 1(-44314.03,43473.03) 1(-44314.03,43473.03) 1(-44313.58,43528.94) 1(-44313.58,43528.94) 1(-44313.16,43473.03) 1(-44313.16,43473.03) 1(-44312.7,43473.94) 1(-44312.7,43473.94) 1(-44312.7,43581.29) 1(-44312.7,43581.29) 1(-44312.25,43529.4) 1(-44312.25,43529.4) 1(-44311.79,43473.94) 1(-44311.79,43473.94) 1(-44311.79,43617.95) 1(-44311.79,43617.95) 1(-44310.47,43475.27) 1(-44310.47,43475.27) 1(-44309.56,43475.27) 1(-44309.56,43475.27) 1(-44308.68,43532.09) 1(-44308.68,43532.09) 1(-44308.68,43580.84) 1(-44308.68,43580.84) 1(-44308.68,43617.49) 1(-44308.68,43617.49) 1(-44307.78,43477.05) 1(-44307.78,43477.05) 1(-44306.87,43477.05) 1(-44306.87,43477.05) 1(-44305.99,43478.41) 1(-44305.99,43478.41) 1(-44305.54,43533.87) 1(-44305.54,43533.87) 1(-44305.54,43579.47) 1(-44305.54,43579.47) 1(-44305.08,43478.41) 1(-44305.08,43478.41) 1(-44304.21,43479.74) 1(-44304.21,43479.74) 1(-44303.76,43615.71) 1(-44303.76,43615.71) 1(-44303.3,43479.74) 1(-44303.3,43479.74) 1(-44303.3,43534.74) 1(-44303.3,43534.74) 1(-44302.85,43480.65) 1(-44302.85,43480.65) 1(-44301.98,43480.65) 1(-44301.98,43480.65) 1(-44301.52,43481.52) 1(-44301.52,43481.52) 1(-44300.61,43481.52) 1(-44300.61,43481.52) 1(-44300.16,43536.98) 1(-44300.16,43536.98) 1(-44299.29,43482.89) 1(-44299.29,43482.89) 1(-44299.29,43578.6) 1(-44299.29,43578.6) 1(-44298.83,43614.84) 1(-44298.83,43614.84) 1(-44298.38,43482.89) 1(-44298.38,43482.89) 1(-44297.05,43538.34) 1(-44297.05,43538.34) 1(-44296.59,43484.67) 1(-44296.59,43484.67) 1(-44295.68,43484.67) 1(-44295.68,43484.67) 1(-44295.68,43539.67) 1(-44295.68,43539.67) 1(-44295.68,43613.48) 1(-44295.68,43613.48) 1(-44294.81,43486) 1(-44294.81,43486) 1(-44294.36,43540.13) 1(-44294.36,43540.13) 1(-44294.36,43576.82) 1(-44294.36,43576.82) 1(-44293.9,43486) 1(-44293.9,43486) 1(-44293.03,43487.36) 1(-44293.03,43487.36) 1(-44293.03,43541.45) 1(-44293.03,43541.45) 1(-44292.58,43613.02) 1(-44292.58,43613.02) 1(-44292.12,43487.36) 1(-44292.12,43487.36) 1(-44291.67,43488.23) 1(-44291.67,43488.23) 1(-44291.67,43541.91) 1(-44291.67,43541.91) 1(-44290.79,43488.23) 1(-44290.79,43488.23) 1(-44290.34,43489.14) 1(-44290.34,43489.14) 1(-44290.34,43543.27) 1(-44290.34,43543.27) 1(-44289.43,43489.14) 1(-44289.43,43489.14) 1(-44289.43,43575.91) 1(-44289.43,43575.91) 1(-44289.43,43611.69) 1(-44289.43,43611.69) 1(-44288.97,43543.69) 1(-44288.97,43543.69) 1(-44288.1,43490.47) 1(-44288.1,43490.47) 1(-44287.65,43545.05) 1(-44287.65,43545.05) 1(-44287.19,43490.47) 1(-44287.19,43490.47) 1(-44286.32,43545.51) 1(-44286.32,43545.51) 1(-44286.32,43574.58) 1(-44286.32,43574.58) 1(-44286.32,43611.24) 1(-44286.32,43611.24) 1(-44285.41,43492.25) 1(-44285.41,43492.25) 1(-44284.5,43492.25) 1(-44284.5,43492.25) 1(-44283.63,43493.61) 1(-44283.63,43493.61) 1(-44283.18,43609.91) 1(-44283.18,43609.91) 1(-44282.72,43493.61) 1(-44282.72,43493.61) 1(-44282.72,43548.16) 1(-44282.72,43548.16) 1(-44281.85,43494.94) 1(-44281.85,43494.94) 1(-44281.39,43548.62) 1(-44281.39,43548.62) 1(-44280.94,43494.94) 1(-44280.94,43494.94) 1(-44280.48,43495.85) 1(-44280.48,43495.85) 1(-44280.03,43609.46) 1(-44280.03,43609.46) 1(-44279.61,43495.85) 1(-44279.61,43495.85) 1(-44279.61,43573.22) 1(-44279.61,43573.22) 1(-44279.16,43496.73) 1(-44279.16,43496.73) 1(-44278.25,43496.73) 1(-44278.25,43496.73) 1(-44278.25,43550.85) 1(-44278.25,43550.85) 1(-44277.79,43497.63) 1(-44277.79,43497.63) 1(-44276.92,43497.63) 1(-44276.92,43497.63) 1(-44276.92,43551.31) 1(-44276.92,43551.31) 1(-44276.92,43608.13) 1(-44276.92,43608.13) 1(-44276.47,43498.54) 1(-44276.47,43498.54) 1(-44275.56,43498.54) 1(-44275.56,43498.54) 1(-44274.68,43499.87) 1(-44274.68,43499.87) 1(-44273.77,43553.55) 1(-44273.77,43553.55) 1(-44273.77,43607.68) 1(-44273.77,43607.68) 1(-44273.77,43499.87) 1(-44273.77,43499.87) 1(-44272.9,43501.2) 1(-44272.9,43501.2) 1(-44272.9,43570.98) 1(-44272.9,43570.98) 1(-44272.45,43554) 1(-44272.45,43554) 1(-44271.99,43501.2) 1(-44271.99,43501.2) 1(-44271.08,43502.56) 1(-44271.08,43502.56) 1(-44271.08,43555.33) 1(-44271.08,43555.33) 1(-44270.66,43606.31) 1(-44270.66,43606.31) 1(-44270.21,43502.56) 1(-44270.21,43502.56) 1(-44269.76,43555.78) 1(-44269.76,43555.78) 1(-44269.3,43503.89) 1(-44269.3,43503.89) 1(-44268.43,43503.89) 1(-44268.43,43503.89) 1(-44268.43,43557.11) 1(-44268.43,43557.11) 1(-44267.97,43504.8) 1(-44267.97,43504.8) 1(-44267.97,43570.11) 1(-44267.97,43570.11) 1(-44267.52,43605.89) 1(-44267.52,43605.89) 1(-44267.07,43504.8) 1(-44267.07,43504.8) 1(-44267.07,43557.56) 1(-44267.07,43557.56) 1(-44266.61,43505.67) 1(-44266.61,43505.67) 1(-44265.74,43505.67) 1(-44265.74,43505.67) 1(-44265.74,43558.93) 1(-44265.74,43558.93) 1(-44265.28,43506.58) 1(-44265.28,43506.58) 1(-44264.83,43604.53) 1(-44264.83,43604.53) 1(-44264.37,43506.58) 1(-44264.37,43506.58) 1(-44264.37,43559.35) 1(-44264.37,43559.35) 1(-44263.5,43507.91) 1(-44263.5,43507.91) 1(-44263.05,43560.71) 1(-44263.05,43560.71) 1(-44263.05,43568.29) 1(-44263.05,43568.29) 1(-44262.59,43507.91) 1(-44262.59,43507.91) 1(-44261.72,43509.27) 1(-44261.72,43509.27) 1(-44261.72,43561.16) 1(-44261.72,43561.16) 1(-44261.72,43604.08) 1(-44261.72,43604.08) 1(-44260.81,43509.27) 1(-44260.81,43509.27) 1(-44260.36,43562.49) 1(-44260.36,43562.49) 1(-44259.9,43510.6) 1(-44259.9,43510.6) 1(-44259.9,43567.87) 1(-44259.9,43567.87) 1(-44259.03,43510.6) 1(-44259.03,43510.6) 1(-44258.12,43511.96) 1(-44258.12,43511.96) 1(-44257.66,43602.29) 1(-44257.66,43602.29) 1(-44257.25,43511.96) 1(-44257.25,43511.96) 1(-44256.79,43564.73) 1(-44256.79,43564.73) 1(-44256.34,43513.29) 1(-44256.34,43513.29) 1(-44255.43,43513.29) 1(-44255.43,43513.29) 1(-44255.43,43565.18) 1(-44255.43,43565.18) 1(-44255.01,43566.51) 1(-44255.01,43566.51) 1(-44254.55,43601.84) 1(-44254.55,43601.84) 1(-44254.55,43514.62) 1(-44254.55,43514.62) 1(-44253.65,43514.62) 1(-44253.65,43514.62) 1(-44252.77,43515.98) 1(-44252.77,43515.98) 1(-44251.86,43515.98) 1(-44251.86,43515.98) 1(-44250.95,43517.31) 1(-44250.95,43517.31) 1(-44250.08,43517.31) 1(-44250.08,43517.31) 1(-44249.17,43518.67) 1(-44249.17,43518.67) 1(-44248.3,43518.67) 1(-44248.3,43518.67) 1(-44246.48,43520.91) 1(-44246.48,43520.91) 1(-44245.61,43520.91) 1(-44245.61,43520.91) 1(-44243.83,43523.14) 1(-44243.83,43523.14) 1(-44242.92,43523.14) 1(-44242.92,43523.14) 1(-44242.01,43524.47) 1(-44242.01,43524.47) 1(-44242.01,43597.37) 1(-44242.01,43597.37) 1(-44241.14,43524.47) 1(-44241.14,43524.47) 1(-44240.23,43525.8) 1(-44240.23,43525.8) 1(-44239.35,43525.8) 1(-44239.35,43525.8) 1(-44238.9,43596.95) 1(-44238.9,43596.95) 1(-44238.44,43527.16) 1(-44238.44,43527.16) 1(-44237.54,43527.16) 1(-44237.54,43527.16) 1(-44236.66,43528.49) 1(-44236.66,43528.49) 1(-44235.75,43528.49) 1(-44235.75,43528.49) 1(-44235.75,43595.58) 1(-44235.75,43595.58) 1(-44234.88,43529.85) 1(-44234.88,43529.85) 1(-44233.97,43529.85) 1(-44233.97,43529.85) 1(-44233.06,43531.18) 1(-44233.06,43531.18) 1(-44232.64,43595.13) 1(-44232.64,43595.13) 1(-44232.19,43531.18) 1(-44232.19,43531.18) 1(-44230.41,43533.42) 1(-44230.41,43533.42) 1(-44229.5,43533.42) 1(-44229.5,43533.42) 1(-44228.17,43535.2) 1(-44228.17,43535.2) 1(-44227.26,43535.2) 1(-44227.26,43535.2) 1(-44225.48,43537.44) 1(-44225.48,43537.44) 1(-44224.57,43537.44) 1(-44224.57,43537.44) 1(-44222.79,43539.67) 1(-44222.79,43539.67) 1(-44221.88,43539.67) 1(-44221.88,43539.67) 1(-44221.01,43541.04) 1(-44221.01,43541.04) 1(-44220.1,43541.04) 1(-44220.1,43541.04) 1(-44219.23,43542.36) 1(-44219.23,43542.36) 1(-44219.23,43590.24) 1(-44219.23,43590.24) 1(-44218.32,43542.36) 1(-44218.32,43542.36) 1(-44217.86,43590.66) 1(-44217.86,43590.66) 1(-44217.41,43543.69) 1(-44217.41,43543.69) 1(-44216.53,43543.69) 1(-44216.53,43543.69) 1(-44216.53,43591.11) 1(-44216.53,43591.11) 1(-44214.75,43592.89) 1(-44214.75,43592.89) 1(-44213.39,43593.35) 1(-44213.39,43593.35) 1(-44212.93,43547.74) 1(-44212.93,43547.74) 1(-44212.06,43547.74) 1(-44212.06,43547.74) 1(-44212.06,43594.71) 1(-44212.06,43594.71) 1(-44211.61,43548.62) 1(-44211.61,43548.62) 1(-44210.7,43548.62) 1(-44210.7,43548.62) 1(-44210.7,43595.13) 1(-44210.7,43595.13) 1(-44209.37,43596.49) 1(-44209.37,43596.49) 1(-44208.92,43550.85) 1(-44208.92,43550.85) 1(-44208.04,43550.85) 1(-44208.04,43550.85) 1(-44208.04,43596.95) 1(-44208.04,43596.95) 1(-44207.13,43552.22) 1(-44207.13,43552.22) 1(-44206.68,43598.28) 1(-44206.68,43598.28) 1(-44206.23,43552.22) 1(-44206.23,43552.22) 1(-44205.81,43553.09) 1(-44205.81,43553.09) 1(-44205.35,43598.73) 1(-44205.35,43598.73) 1(-44203.99,43600.06) 1(-44203.99,43600.06) 1(-44202.66,43600.51) 1(-44202.66,43600.51) 1(-44200.88,43602.29) 1(-44200.88,43602.29) 1(-44199.51,43602.75) 1(-44199.51,43602.75) 1(-44198.64,43551.31) 1(-44198.64,43551.31) 1(-44198.19,43604.08) 1(-44198.19,43604.08) 1(-44196.86,43604.53) 1(-44196.86,43604.53) 1(-44195.5,43549.98) 1(-44195.5,43549.98) 1(-44195.04,43606.31) 1(-44195.04,43606.31) 1(-44193.72,43606.77) 1(-44193.72,43606.77) 1(-44192.39,43549.53) 1(-44192.39,43549.53) 1(-44192.39,43608.13) 1(-44192.39,43608.13) 1(-44191.02,43608.55) 1(-44191.02,43608.55) 1(-44190.57,43609.46) 1(-44190.57,43609.46) 1(-44189.24,43548.16) 1(-44189.24,43548.16) 1(-44189.24,43609.91) 1(-44189.24,43609.91) 1(-44187.91,43611.24) 1(-44187.91,43611.24) 1(-44186.55,43611.69) 1(-44186.55,43611.69) 1(-44186.1,43547.74) 1(-44186.1,43547.74) 1(-44184.77,43613.48) 1(-44184.77,43613.48) 1(-44182.99,43546.38) 1(-44182.99,43546.38) 1(-44181.21,43615.71) 1(-44181.21,43615.71) 1(-44179.84,43545.93) 1(-44179.84,43545.93) 1(-44179.84,43616.17) 1(-44179.84,43616.17) 1(-44179.38,43617.08) 1(-44179.38,43617.08) 1(-44178.06,43617.49) 1(-44178.06,43617.49) 1(-44177.61,43576.82) 1(-44177.61,43576.82) 1(-44177.61,43618.4) 1(-44177.61,43618.4) 1(-44177.15,43577.69) 1(-44177.15,43577.69) 1(-44176.73,43544.6) 1(-44176.73,43544.6) 1(-44176.28,43577.69) 1(-44176.28,43577.69) 1(-44176.28,43618.86) 1(-44176.28,43618.86) 1(-44175.82,43619.73) 1(-44175.82,43619.73) 1(-44174.5,43620.19) 1(-44174.5,43620.19) 1(-44174.04,43621.1) 1(-44174.04,43621.1) 1(-44173.59,43544.15) 1(-44173.59,43544.15) 1(-44172.68,43621.55) 1(-44172.68,43621.55) 1(-44172.26,43582.17) 1(-44172.26,43582.17) 1(-44172.26,43622.42) 1(-44172.26,43622.42) 1(-44171.35,43582.17) 1(-44171.35,43582.17) 1(-44170.9,43622.88) 1(-44170.9,43622.88) 1(-44170.44,43623.79) 1(-44170.44,43623.79) 1(-44169.57,43584.4) 1(-44169.57,43584.4) 1(-44169.11,43542.36) 1(-44169.11,43542.36) 1(-44169.11,43624.21) 1(-44169.11,43624.21) 1(-44168.66,43584.4) 1(-44168.66,43584.4) 1(-44167.33,43626.02) 1(-44167.33,43626.02) 1(-44165.97,43541.91) 1(-44165.97,43541.91) 1(-44165.97,43587.55) 1(-44165.97,43587.55) 1(-44165.97,43626.44) 1(-44165.97,43626.44) 1(-44165.1,43587.55) 1(-44165.1,43587.55) 1(-44164.18,43628.26) 1(-44164.18,43628.26) 1(-44162.86,43540.58) 1(-44162.86,43540.58) 1(-44162.86,43628.68) 1(-44162.86,43628.68) 1(-44162.41,43629.59) 1(-44162.41,43629.59) 1(-44161.95,43591.11) 1(-44161.95,43591.11) 1(-44161.08,43591.11) 1(-44161.08,43591.11) 1(-44161.08,43630.04) 1(-44161.08,43630.04) 1(-44159.71,43540.13) 1(-44159.71,43540.13) 1(-44159.71,43570.53) 1(-44159.71,43570.53) 1(-44159.71,43631.37) 1(-44159.71,43631.37) 1(-44158.39,43539.22) 1(-44158.39,43539.22) 1(-44158.39,43594.26) 1(-44158.39,43594.26) 1(-44158.39,43631.82) 1(-44158.39,43631.82) 1(-44157.48,43594.26) 1(-44157.48,43594.26) 1(-44156.6,43633.6) 1(-44156.6,43633.6) 1(-44155.24,43634.06) 1(-44155.24,43634.06) 1(-44153.46,43538.34) 1(-44153.46,43538.34) 1(-44153.46,43635.84) 1(-44153.46,43635.84) 1(-44153,43599.18) 1(-44153,43599.18) 1(-44152.13,43599.18) 1(-44152.13,43599.18) 1(-44152.13,43636.3) 1(-44152.13,43636.3) 1(-44151.68,43637.21) 1(-44151.68,43637.21) 1(-44150.77,43600.97) 1(-44150.77,43600.97) 1(-44150.32,43536.98) 1(-44150.32,43536.98) 1(-44150.32,43637.62) 1(-44150.32,43637.62) 1(-44149.9,43600.97) 1(-44149.9,43600.97) 1(-44148.98,43638.99) 1(-44148.98,43638.99) 1(-44148.07,43566.51) 1(-44148.07,43566.51) 1(-44147.66,43639.44) 1(-44147.66,43639.44) 1(-44147.2,43536.56) 1(-44147.2,43536.56) 1(-44147.2,43604.08) 1(-44147.2,43604.08) 1(-44147.2,43640.31) 1(-44147.2,43640.31) 1(-44146.3,43604.08) 1(-44146.3,43604.08) 1(-44145.84,43605.44) 1(-44145.84,43605.44) 1(-44145.84,43640.77) 1(-44145.84,43640.77) 1(-44145.42,43605.44) 1(-44145.42,43605.44) 1(-44144.51,43642.1) 1(-44144.51,43642.1) 1(-44144.05,43535.2) 1(-44144.05,43535.2) 1(-44143.19,43608.13) 1(-44143.19,43608.13) 1(-44143.19,43642.55) 1(-44143.19,43642.55) 1(-44142.28,43608.13) 1(-44142.28,43608.13) 1(-44141.82,43564.73) 1(-44141.82,43564.73) 1(-44141.37,43644.33) 1(-44141.37,43644.33) 1(-44140.95,43534.74) 1(-44140.95,43534.74) 1(-44140.04,43644.79) 1(-44140.04,43644.79) 1(-44138.71,43646.15) 1(-44138.71,43646.15) 1(-44137.8,43533.42) 1(-44137.8,43533.42) 1(-44137.35,43646.57) 1(-44137.35,43646.57) 1(-44136.89,43562.49) 1(-44136.89,43562.49) 1(-44136.89,43647.48) 1(-44136.89,43647.48) 1(-44135.57,43615.26) 1(-44135.57,43615.26) 1(-44135.57,43647.93) 1(-44135.57,43647.93) 1(-44134.66,43532.96) 1(-44134.66,43532.96) 1(-44134.66,43615.26) 1(-44134.66,43615.26) 1(-44133.78,43649.71) 1(-44133.78,43649.71) 1(-44132.42,43650.17) 1(-44132.42,43650.17) 1(-44132,43651.04) 1(-44132,43651.04) 1(-44131.55,43531.63) 1(-44131.55,43531.63) 1(-44131.1,43619.31) 1(-44131.1,43619.31) 1(-44130.64,43560.71) 1(-44130.64,43560.71) 1(-44130.64,43651.5) 1(-44130.64,43651.5) 1(-44130.19,43619.31) 1(-44130.19,43619.31) 1(-44128.85,43653.28) 1(-44128.85,43653.28) 1(-44128.4,43531.18) 1(-44128.4,43531.18) 1(-44127.53,43653.73) 1(-44127.53,43653.73) 1(-44127.08,43530.27) 1(-44127.08,43530.27) 1(-44126.62,43655.1) 1(-44126.62,43655.1) 1(-44125.71,43558.47) 1(-44125.71,43558.47) 1(-44125.71,43624.21) 1(-44125.71,43624.21) 1(-44125.29,43655.52) 1(-44125.29,43655.52) 1(-44124.84,43624.21) 1(-44124.84,43624.21) 1(-44124.84,43656.42) 1(-44124.84,43656.42) 1(-44123.93,43529.85) 1(-44123.93,43529.85) 1(-44123.47,43656.88) 1(-44123.47,43656.88) 1(-44123.06,43657.75) 1(-44123.06,43657.75) 1(-44121.69,43658.21) 1(-44121.69,43658.21) 1(-44121.24,43659.11) 1(-44121.24,43659.11) 1(-44120.82,43628.68) 1(-44120.82,43628.68) 1(-44119.91,43628.68) 1(-44119.91,43628.68) 1(-44119.91,43659.57) 1(-44119.91,43659.57) 1(-44119.46,43528.04) 1(-44119.46,43528.04) 1(-44119.46,43556.69) 1(-44119.46,43556.69) 1(-44119.46,43660.44) 1(-44119.46,43660.44) 1(-44118.13,43660.9) 1(-44118.13,43660.9) 1(-44116.34,43662.68) 1(-44116.34,43662.68) 1(-44116.34,43527.62) 1(-44116.34,43527.62) 1(-44114.99,43663.13) 1(-44114.99,43663.13) 1(-44114.53,43554.45) 1(-44114.53,43554.45) 1(-44114.11,43634.97) 1(-44114.11,43634.97) 1(-44113.2,43664.92) 1(-44113.2,43664.92) 1(-44113.2,43634.97) 1(-44113.2,43634.97) 1(-44111.88,43525.8) 1(-44111.88,43525.8) 1(-44111.88,43665.37) 1(-44111.88,43665.37) 1(-44110.06,43667.15) 1(-44110.06,43667.15) 1(-44109.18,43639.44) 1(-44109.18,43639.44) 1(-44108.73,43667.61) 1(-44108.73,43667.61) 1(-44108.73,43525.38) 1(-44108.73,43525.38) 1(-44108.27,43639.44) 1(-44108.27,43639.44) 1(-44108.27,43668.52) 1(-44108.27,43668.52) 1(-44106.95,43668.93) 1(-44106.95,43668.93) 1(-44106.49,43669.84) 1(-44106.49,43669.84) 1(-44105.58,43524.02) 1(-44105.58,43524.02) 1(-44105.16,43670.3) 1(-44105.16,43670.3) 1(-44104.71,43671.17) 1(-44104.71,43671.17) 1(-44103.35,43671.63) 1(-44103.35,43671.63) 1(-44102.93,43672.53) 1(-44102.93,43672.53) 1(-44102.47,43523.56) 1(-44102.47,43523.56) 1(-44101.56,43672.99) 1(-44101.56,43672.99) 1(-44101.11,43522.69) 1(-44101.11,43522.69) 1(-44101.11,43673.86) 1(-44101.11,43673.86) 1(-44100.24,43549.98) 1(-44100.24,43549.98) 1(-44099.78,43674.32) 1(-44099.78,43674.32) 1(-44099.33,43675.22) 1(-44099.33,43675.22) 1(-44098,43522.23) 1(-44098,43522.23) 1(-44098,43548.62) 1(-44098,43548.62) 1(-44098,43650.17) 1(-44098,43650.17) 1(-44098,43675.64) 1(-44098,43675.64) 1(-44097.54,43676.55) 1(-44097.54,43676.55) 1(-44097.09,43650.17) 1(-44097.09,43650.17) 1(-44096.22,43677.01) 1(-44096.22,43677.01) 1(-44095.76,43548.16) 1(-44095.76,43548.16) 1(-44095.76,43677.88) 1(-44095.76,43677.88) 1(-44094.86,43520.91) 1(-44094.86,43520.91) 1(-44094.4,43678.34) 1(-44094.4,43678.34) 1(-44093.52,43546.84) 1(-44093.52,43546.84) 1(-44092.62,43655.1) 1(-44092.62,43655.1) 1(-44092.62,43680.12) 1(-44092.62,43680.12) 1(-44091.75,43520.45) 1(-44091.75,43520.45) 1(-44091.75,43655.1) 1(-44091.75,43655.1) 1(-44091.29,43680.57) 1(-44091.29,43680.57) 1(-44090.84,43681.48) 1(-44090.84,43681.48) 1(-44090.38,43519.54) 1(-44090.38,43519.54) 1(-44089.51,43681.93) 1(-44089.51,43681.93) 1(-44089.05,43682.81) 1(-44089.05,43682.81) 1(-44087.69,43683.26) 1(-44087.69,43683.26) 1(-44087.27,43684.17) 1(-44087.27,43684.17) 1(-44085.91,43684.59) 1(-44085.91,43684.59) 1(-44085.45,43518.67) 1(-44085.45,43518.67) 1(-44084.13,43686.41) 1(-44084.13,43686.41) 1(-44083.22,43543.69) 1(-44083.22,43543.69) 1(-44083.22,43664.04) 1(-44083.22,43664.04) 1(-44082.8,43686.83) 1(-44082.8,43686.83) 1(-44082.34,43517.31) 1(-44082.34,43517.31) 1(-44082.34,43664.04) 1(-44082.34,43664.04) 1(-44081.89,43688.19) 1(-44081.89,43688.19) 1(-44080.56,43688.64) 1(-44080.56,43688.64) 1(-44080.11,43689.52) 1(-44080.11,43689.52) 1(-44079.2,43516.85) 1(-44079.2,43516.85) 1(-44078.74,43689.97) 1(-44078.74,43689.97) 1(-44078.32,43541.45) 1(-44078.32,43541.45) 1(-44078.32,43690.88) 1(-44078.32,43690.88) 1(-44076.96,43669.84) 1(-44076.96,43669.84) 1(-44076.96,43691.3) 1(-44076.96,43691.3) 1(-44076.51,43692.21) 1(-44076.51,43692.21) 1(-44076.09,43515.52) 1(-44076.09,43515.52) 1(-44076.09,43669.84) 1(-44076.09,43669.84) 1(-44075.18,43692.66) 1(-44075.18,43692.66) 1(-44074.73,43693.54) 1(-44074.73,43693.54) 1(-44073.4,43540.13) 1(-44073.4,43540.13) 1(-44073.4,43672.99) 1(-44073.4,43672.99) 1(-44073.4,43693.99) 1(-44073.4,43693.99) 1(-44072.95,43515.07) 1(-44072.95,43515.07) 1(-44072.95,43694.9) 1(-44072.95,43694.9) 1(-44072.49,43672.99) 1(-44072.49,43672.99) 1(-44071.62,43695.35) 1(-44071.62,43695.35) 1(-44071.16,43696.23) 1(-44071.16,43696.23) 1(-44069.8,43513.74) 1(-44069.8,43513.74) 1(-44069.8,43696.68) 1(-44069.8,43696.68) 1(-44069.38,43697.59) 1(-44069.38,43697.59) 1(-44068.47,43537.89) 1(-44068.47,43537.89) 1(-44068.02,43698.01) 1(-44068.02,43698.01) 1(-44067.56,43698.92) 1(-44067.56,43698.92) 1(-44066.69,43513.29) 1(-44066.69,43513.29) 1(-44066.23,43699.37) 1(-44066.23,43699.37) 1(-44065.78,43700.24) 1(-44065.78,43700.24) 1(-44064.46,43700.7) 1(-44064.46,43700.7) 1(-44063.54,43511.96) 1(-44063.54,43511.96) 1(-44063.54,43536.56) 1(-44063.54,43536.56) 1(-44062.67,43702.48) 1(-44062.67,43702.48) 1(-44062.21,43683.72) 1(-44062.21,43683.72) 1(-44061.31,43535.2) 1(-44061.31,43535.2) 1(-44061.31,43683.72) 1(-44061.31,43683.72) 1(-44061.31,43702.94) 1(-44061.31,43702.94) 1(-44060.86,43703.84) 1(-44060.86,43703.84) 1(-44060.44,43511.51) 1(-44060.44,43511.51) 1(-44059.53,43704.3) 1(-44059.53,43704.3) 1(-44059.07,43534.74)